# Altium PCB PCB1.PcbDoc
Units mil, origin at the board's own origin, x right, y up, seen from the top; angles counter-clockwise.
Board outline 4525.8 x 3141 mil, 2 copper layers (Top Layer, Bottom Layer); 15 components, 12 nets, 75 pads, 0 vias.
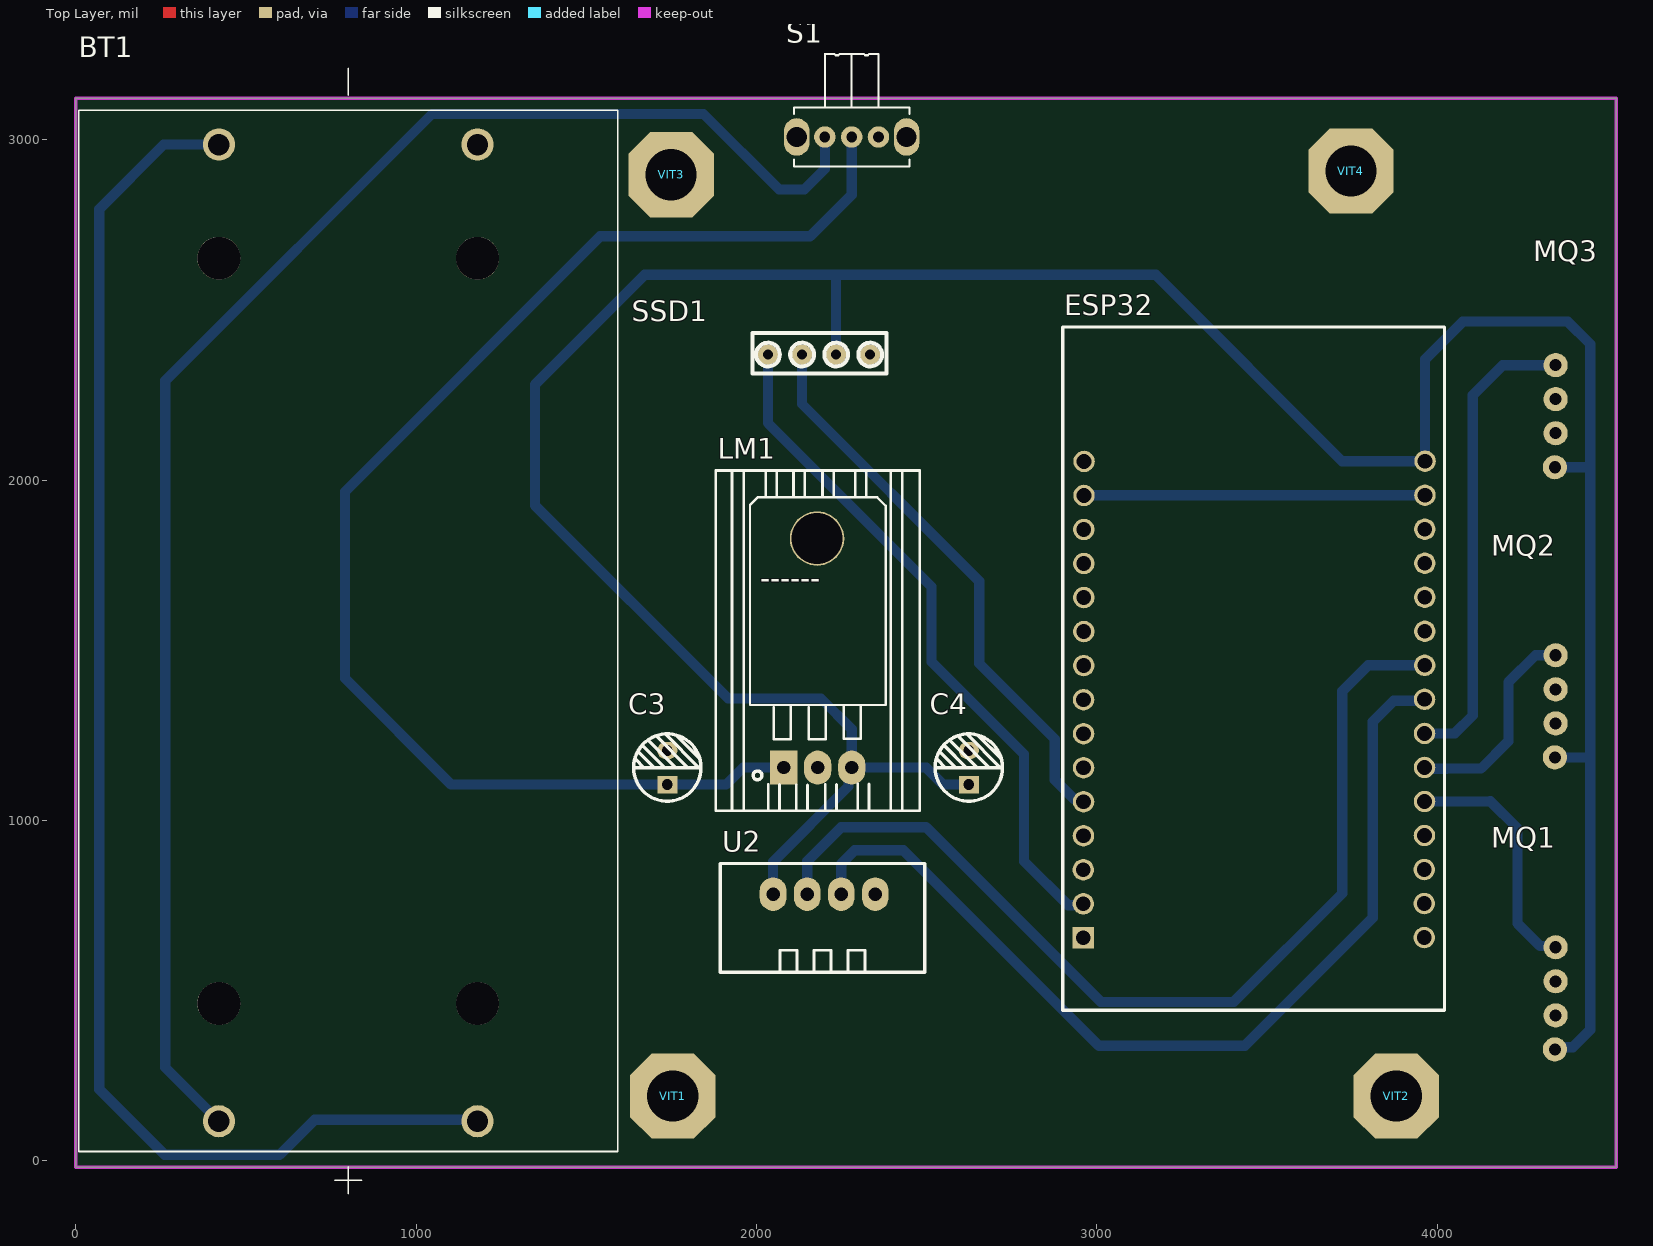
[diagram p0: Top Layer view]
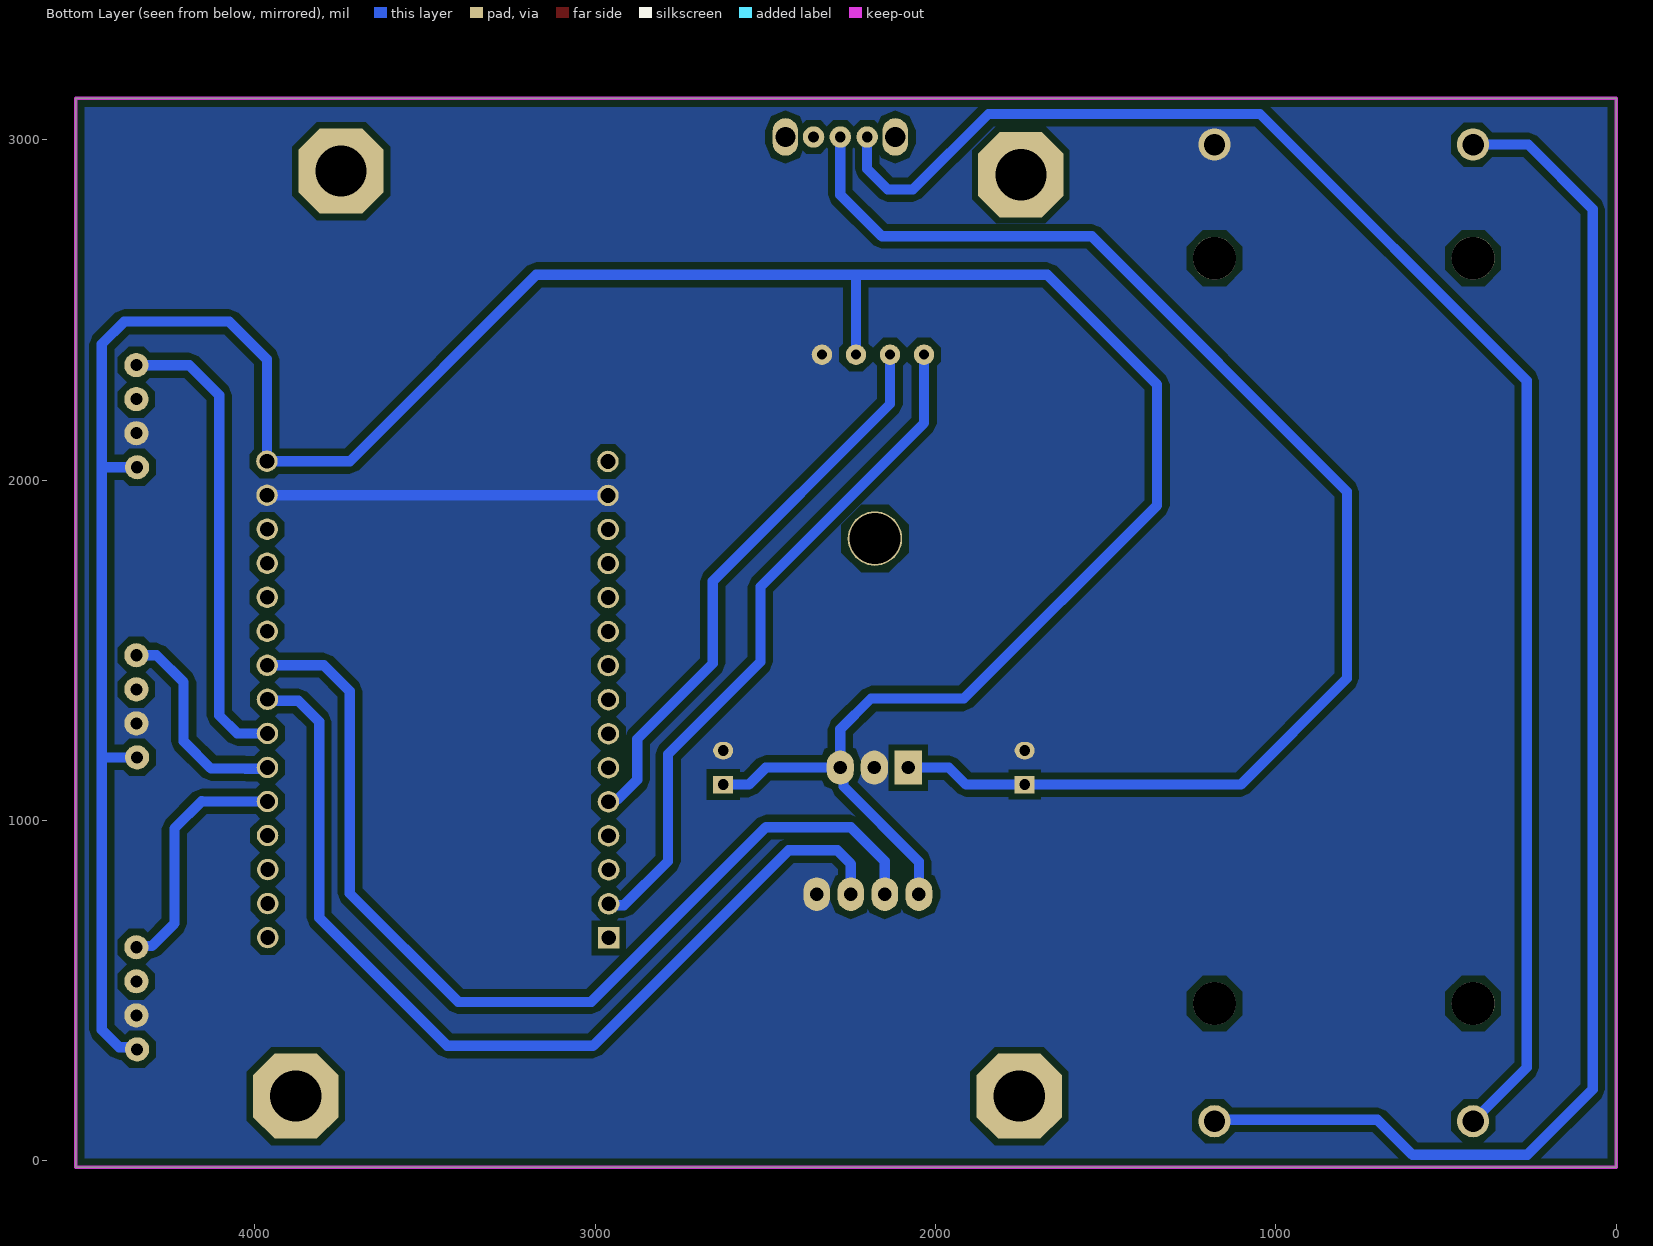
[diagram p1: Bottom Layer view, seen from below]
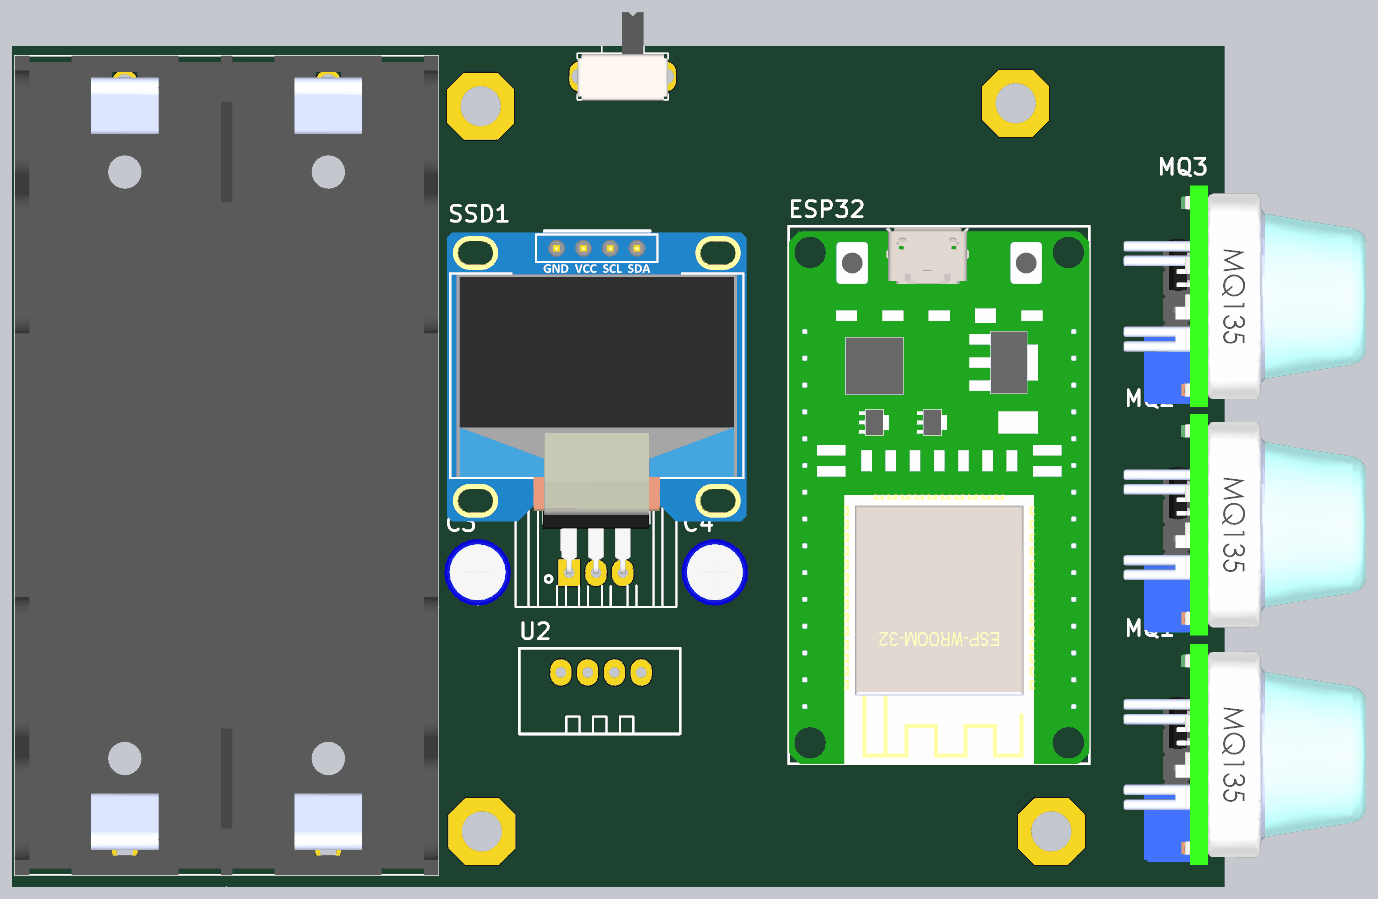
[diagram p2: 3D render of the assembled board from above, using the file's embedded part models]

## Layer stack, top to bottom
Top Solder: solder mask 0.4, Solder Resist, Dk 3.5
Top Layer: signal copper 1.4
Dielectric 1: dielectric 12.6, FR-4, Dk 4.8
Bottom Layer: signal copper 1.4
Bottom Solder: solder mask 0.4, Solder Resist, Dk 3.5

## Board outline
0,-19 0,3122 4525.8,3122 4525.8,-19

## Design rules (kind name [scope] priority, off if disabled: settings)
Clearance [All] p1: gap=19 ignorepadtopadclearanceinfootprint=FALSE
ComponentClearance [All] p1: gap=10 collisioncheckmode=3 verticalgap=30 showdistances=FALSE
Height [All] p1: minheight=0 maxheight=3000 prefheight=500
PlaneClearance [All] p1: clearance=60
PolygonConnect [All] p1: connectstyle=Direct reliefconductorwidth=10 reliefentries=4 polygonreliefangle="90 Angle" airgapwidth=10
RoutingVias [All] p1: holewidth=28 width=50 viastyle="Through Hole" minholewidth=28 minwidth=50 maxholewidth=28 maxwidth=50
SolderMaskExpansion [All] p1: expansion=4 istentingtop=FALSE
Width [All] p1: maxlimit=30 minlimit=10 preferedwidth=20
27 further rules are at their usual default settings.

## Components (designator, comment, footprint, x,y, rotation, side; value= is the part's Value field where it differs from the comment)
BT1 "BK-18650-PC4" BAT_BK-18650-PC4 1592.12,27.52 r90 top
C3 "0.33uF" "tu hoa 5mm" 1737.8,1155.5 r90 top
C4 "0.1uF" "tu hoa 5mm" 2623.8,1155.5 r90 top
ESP32 "ESP32 Module 30GPIO" "ESP32 Module 30GPIO_v2" 3462.39,1355.5 r180 top
LM1 "LM7805" TO220NH 2079.8,1155.5 r0 top
MQ1 "MQ135" MQ135 4345.94,327.5 r180 top
MQ2 "MQ135" MQ135 4345.94,1185.5 r180 top
MQ3 "MQ135" MQ135 4345.94,2038 r180 top
S1 "Switch SPDT_Subminiator" "SPDT Subminiator" 2279.56,3008.5 r0 top
SSD1 "Module SSD1306" "Module SSD1306" 2282.8,1487 r270 top
U2 "DHT22" DHT22_180 2193.8,713.5 r270 top
VIT1 "1" "Screw octagon 3.81mm" 1753.8,190 r0 top
VIT2 "1" "Screw octagon 3.81mm" 3879.8,190 r0 top
VIT3 "1" "Screw octagon 3.81mm" 1749.3,2897.5 r0 top
VIT4 "1" "Screw octagon 3.81mm" 3746.8,2908.5 r0 top

## Footprints (in the part's own frame and the unit in brackets; to place one, negate y for a bottom-side part, rotate by r counter-clockwise, add the part's x,y. Pads: shape width x height; smd on the part's side, far side on the other; paste and mask are expansions set on the pad)
BAT_BK-18650-PC4 [mm]
  round 2.4 hole 1.6: 1+(2.252,29.764) 1-(75.152,29.764) 2+(2.252,10.464) 2-(75.152,10.464)
  round 3.2 hole 3.2 unplated: ""(11.042,29.764) ""(11.042,10.464) ""(66.662,10.464) ""(66.662,29.764)
  silkscreen extent -3.15,0.01 80.85,40.22, body extent 0,0 77.7,40.21, height 21.62
DHT22_180 [mm]
  oval 2.5x2 hole 1: 1(-1.778,-3.683) 2(-1.778,-1.143) 3(-1.778,1.397) 4(-1.778,3.937)
  silkscreen extent -4.06,-7.62 4.06,7.62, body extent -4.06,-7.74 4.09,7.74, height 25.27
"ESP32 Module 30GPIO_v2" [mm]
  rect 1.6x1.6 hole 1.1: 1(12.755,17.79)
  round 1.6 hole 1.1: 2(12.755,15.25) 3(12.755,12.71) 4(12.745,10.17) 5(12.735,7.63) 6(12.735,5.09) 7(12.735,2.55) 8(12.735,0.01) 9(12.725,-2.53) 10(12.715,-5.07) 11(12.715,-7.61) 12(12.715,-10.15) 13(12.715,-12.69) 14(12.705,-15.23) 15(12.695,-17.77) 16(-12.695,17.77) 17(-12.695,15.23) 18(-12.695,12.69) 19(-12.705,10.15) 20(-12.715,7.61) 21(-12.715,5.07) 22(-12.715,2.53) 23(-12.715,-0.01) 24(-12.725,-2.55) 25(-12.735,-5.09) 26(-12.735,-7.63) 27(-12.735,-10.17) 28(-12.735,-12.71) 29(-12.745,-15.25) 30(-12.755,-17.79)
  silkscreen extent -14.2,-27.8 14.3,23.2, body extent -14.22,-27.73 14.28,23.2, height 12.2
"Module SSD1306" [mil]
  round 60 hole 30: 1(-881.89,50.79) 2(-881.89,-49.21) 3(-881.89,-149.21) 4(-881.89,-249.21)
  silkscreen extent -945,-295 -827,98, body extent -939,-659 139,459, height 418
MQ135 [mm]
  round 1.8 hole 0.9: 1(0,0) 2(-0.06,-2.54) 3(-0.06,-5.08) 4(-0.06,-7.62)
  body extent -18,-14.3 5,6.7, height 39.86
"Screw octagon 3.81mm" [mil] "Screw hole 3.81mm"
  oct 250x250 hole 150: 1(0,0)
"SPDT Subminiator" [mm] "Subminiator SPDT switch"
  round 1.6 hole 0.8: 1(2,0) 2(0,0) 3(-2,0)
  oval 1.9x2.8 hole 1.5: M2(-4.1,0) M2(4.1,0)
  silkscreen extent -4.3,-2.2 4.3,6.2, body extent -4.31,-2.28 4.3,6.09, height 4.7
TO220NH [mil] "TO-220 - 1-2-3"
  rect 80x100 hole 39: 1(0,0)
  oval 80x100 hole 39: 2(100,0) 3(200,0)
  round 160 hole 150: H(98,673)
  silkscreen extent -200,-127 400,873, body extent -100,-4 300,764, height 165
"tu hoa 5mm" [mm]
  rect 1.3x1.5 hole 0.8: 1(-1.27,0)
  oval 1.3x1.5 hole 0.8: 2(1.27,0)
  silkscreen extent -2.51,-2.51 2.51,2.51, body extent -3.12,-3.18 3.23,3.18, height 14.55

## Part data
BT1: "Battery Holder (Open) 18650 2 Cell PC Pin", Package=None, Availability=Unavailable, MP=BK-18650-PC4, Price=None
C3: library part "Tu Hoa 0.33uF 50V 5x11", "Cắm", Chung_Loai=Cắm, Don_Vi=Con, Ma_Hang=MH004655, So_Chan=2, Ten_Linh_Kien="Tụ Hóa 0.33uF 50V 5x11MM"
C4: library part "Tu Hoa 0.1uF 50V 5x11", "Cắm", Chung_Loai=Cắm, Don_Vi=Con, Ma_Hang=MH006853, So_Chan=2, Ten_Linh_Kien="Tụ Hóa 0.1uF 50V"
LM1: library part LM78xx, "IC REG LDO 5V 1A TO220-3"
S1: "Subminiator SPDT Switch", Company=E.P.I.L, Design date=2011/11/02
U2: "SENSOR HUMIDITY/TEMPERATURE", Digikey PN=1528-1228-ND
VIT1 VIT2 VIT3 VIT4: library part VIT, "Vit xuyen lo", Chung_Loai=Cắm, Don_Vi=Con, Ma_Hang=MH002051, Ten_Linh_Kien="CON 2 KF142R 5.08MM"

## Nets (pads, with @x,y where several pads share a name; then routed paths per layer and width w, separated by ;. In a path a pad name is that pad's centre, name@x,y a point inside that pad or via, vN(x,y) a via of type N, cw(c..) or ccw(c..) an arc to the next point about the centre after c; other vN are vias at no path point)
+5: C4.1 ESP32.30 LM1.3 MQ1.1 MQ2.1 MQ3.1 SSD1.2 U2.1 | length 8917.4
  Bottom Layer w30: U2.1 2048.8,879 2270.23,1100.43 2270.23,1145.93 LM1.3 ; SSD1.2 2233.59,2603.45 2233.64,2603.5 ; C4.1 2548.8,1105.5 2498.8,1155.5 LM1.3 ; ESP32.30@3963.37,2055.9 3720.4,2055.9 3172.8,2603.5 2233.64,2603.5 ; ESP32.30 3964.56,2355.76 4074.8,2466 4383.8,2466 4449.8,2400 4449.8,2038 ; MQ1.1@4345.25,333.44 4398.24,333.44 4449.8,385 4449.8,1185.5 ; MQ3.1 4449.8,2038 ; MQ2.1@4347.94,1185.5 4449.8,1185.5 ; 2233.64,2603.5 1671.5,2603.5 1348.8,2280.8 1348.8,1926.5 1916.8,1358.5 2189.3,1358.5 2279.8,1268 LM1.3 ; 4449.8,1185.5 4449.8,2038
GND: BT1.2- C3.2 C4.2 ESP32.14 ESP32.29 LM1.2 MQ1.2 MQ2.2 MQ3.2 SSD1.1 U2.4 | length 1002.3
  Bottom Layer w30: ESP32.14 2962.59,1955.5 3963.77,1955.5 ESP32.29
NC: ESP32.23 U2.3 | length 2815.5
  Bottom Layer w30: U2.3 2248.8,872.5 2288.8,912.5 2431.5,912.5 3006,338 3434.8,338 3810.8,714 3810.8,1290 3872.7,1351.9 ESP32.23@3963.37,1351.9
NetBT1_1+: BT1.1+ S1.3 | length 4715.5
  Bottom Layer w30: BT1.1+ 262.3,274.17 262.3,2292 1046.3,3076 1844.3,3076 2066.3,2854 2140.3,2854 2200.82,2914.52 S1.3
NetBT1_1-: BT1.1- BT1.2+ | length 4252.9
  Bottom Layer w30: BT1.1- 258.05,2986.25 68.3,2796.5 68.3,210 260.55,17.75 598.55,17.75 701.3,120.5 1175.81,120.5 BT1.2+
NetC3_1: C3.1 LM1.1 S1.2 | length 4007.7
  Bottom Layer w30: LM1.1 1960.24,1155.5 1910.24,1105.5 C3.1 1102.8,1105.5 790.8,1417.5 790.8,1966.3 1541,2716.5 2157.5,2716.5 2279.56,2838.56 S1.2
NetESP32_2: ESP32.2 SSD1.4 | length 2029.7
  Bottom Layer w30: SSD1.4 2033.59,2167.71 2514.3,1687 2514.3,1466.5 2785.8,1195 2785.8,880.5 2915.58,750.72 ESP32.2@2961.8,750.72
NetESP32_5: ESP32.5 SSD1.3 | length 1668.2
  Bottom Layer w30: SSD1.3 2133.59,2223.71 2654.3,1703 2654.3,1461.5 2876.3,1239.5 2876.3,1119.86 2934.74,1061.42 2954.7,1061.42 ESP32.5
NetESP32_20: ESP32.20 MQ1.4 | length 730.1
  Bottom Layer w30: ESP32.20 4154.83,1055.9 4155.83,1056.9 4236.3,976.43 4236.3,697 4301.8,631.5 MQ1.4@4352.8,631.5
NetESP32_21: ESP32.21 MQ2.4 | length 624.4
  Bottom Layer w30: ESP32.21@3963.37,1151.9 4027.2,1151.9 4028.2,1152.9 4129.2,1152.9 4209.3,1233 4209.3,1406 4288.8,1485.5 MQ2.4
NetESP32_22: ESP32.22 MQ3.4 | length 1384.8
  Bottom Layer w30: ESP32.22 4051.7,1255.9 4104.3,1308.5 4104.3,2249.5 4192.8,2338 MQ3.4
SIG: ESP32.24 U2.2 | length 2922.5
  Bottom Layer w30: U2.2 2148.8,879.93 2248.87,980 2498.3,980 3011.3,467 3402.8,467 3721.3,785.5 3721.3,1379.5 3797.7,1455.9 ESP32.24
pads on no net: BT1. ESP32.1 ESP32.3 ESP32.4 ESP32.6 ESP32.7 ESP32.8 ESP32.9 ESP32.10 ESP32.11 ESP32.12 ESP32.13 ESP32.15 ESP32.16 ESP32.17 ESP32.18 ESP32.19 ESP32.25 ESP32.26 ESP32.27 ESP32.28 LM1.H MQ1.3 MQ2.3 MQ3.3 S1.1 S1.M2 VIT1.1 VIT2.1 VIT3.1 VIT4.1

## Polygon pours and split planes (outlines as drawn)
GND on Bottom Layer "NONET_L-01_P-001" (solid, pour order 0): 0,3122 4525.8,3122 4525.8,-19 0,-19 0,3122

## Keep-outs
Keep-Out Layer:
  the board outline again, w10

## Dimensions
0,3122 to 4525.8,3122 on Multi-Layer
0,3122 to 0,-19 on Multi-Layer

## Text inside footprints (layer, text, board x,y; h text height)
LM1: Top Overlay "------" at 2010.8,1682.5 h60